# Altium PCB Труба_сенсор.PcbDoc
Units mm, origin at the board's own origin, x right, y up, seen from the top; angles counter-clockwise.
Board outline 25 x 25 mm, 2 copper layers (Top Layer, Bottom Layer), stack 1.671 mm thick; 1 components, 3 nets, 23 pads, 6 vias.
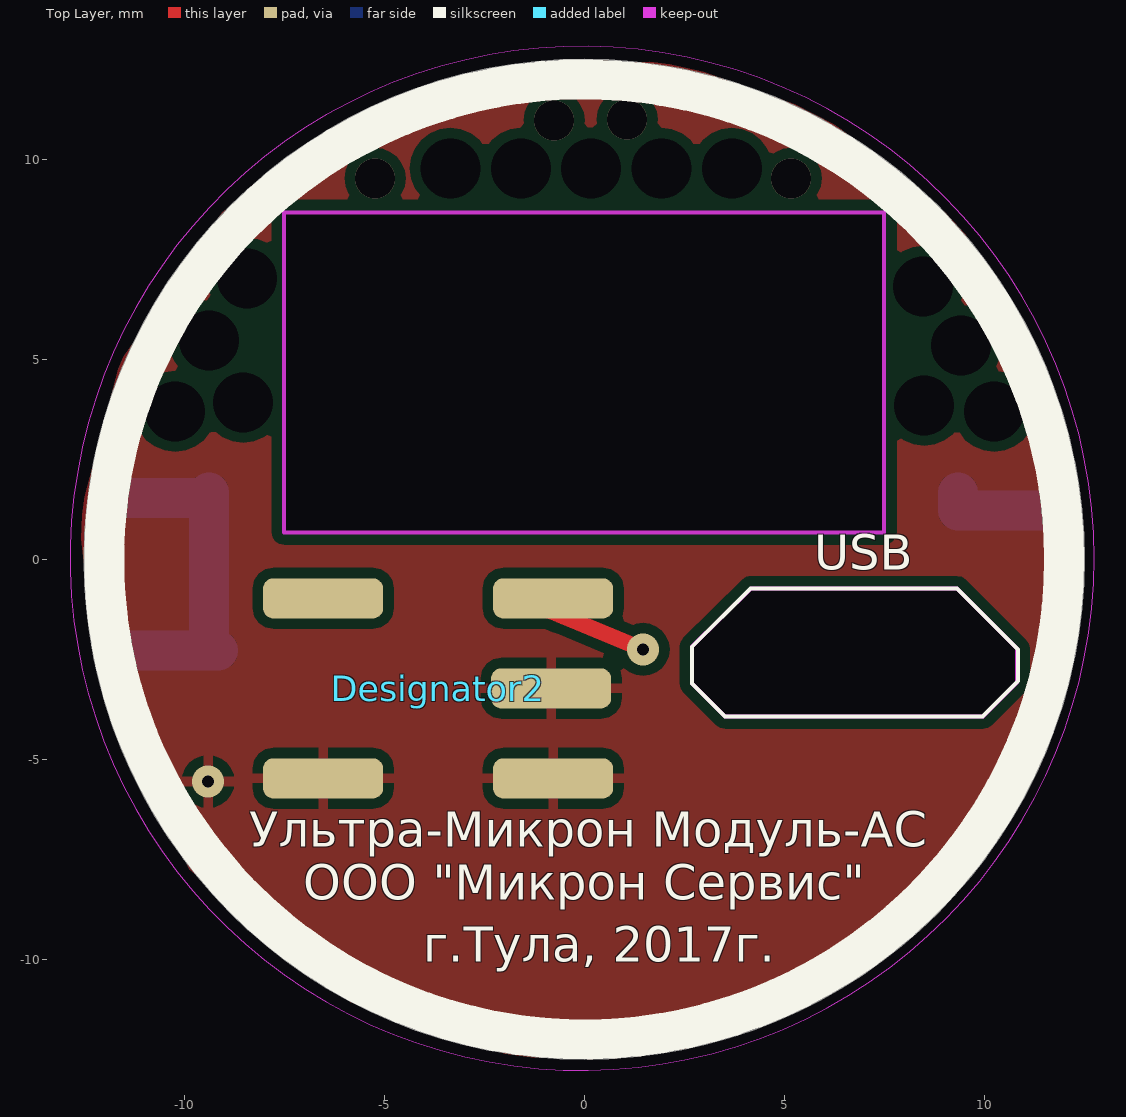
[diagram p0: Top Layer view]
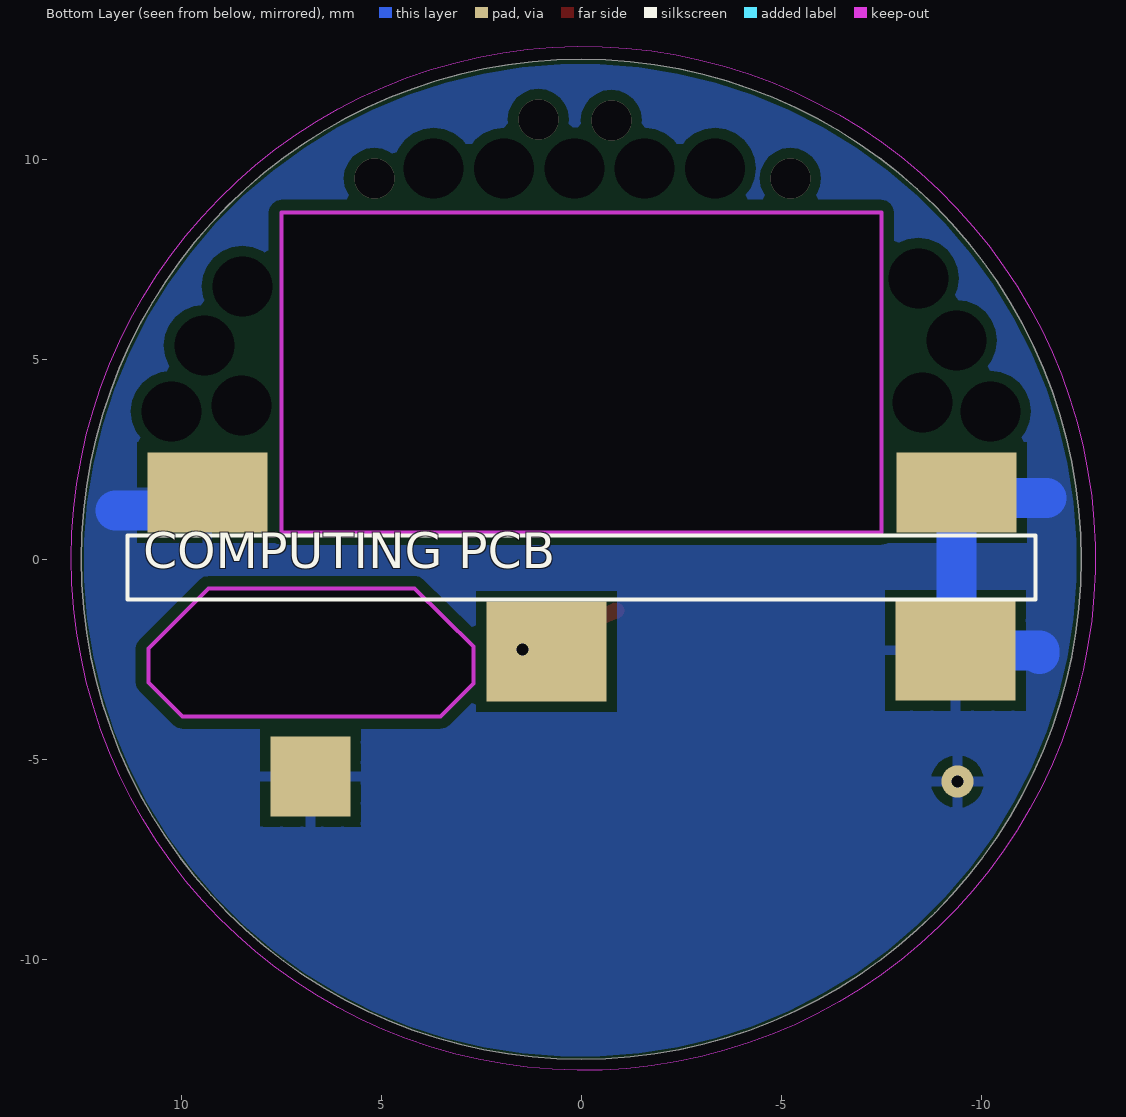
[diagram p1: Bottom Layer view, seen from below]

## Layer stack, top to bottom
Top Solder: solder mask 0.0102, Solder Resist, Dk 3.5
Top Layer: signal copper 0.0356
Dielectric 1: dielectric 1.6, FR-4, Dk 4.8
Bottom Layer: signal copper 0.0356
Bottom Solder: solder mask 0.0102, Solder Resist, Dk 3.5

## Board outline
-12.5,0 ccw(c0,0) 0,-12.5 ccw(c0,0) 12.5,0 ccw(c0,0) 0,12.5 ccw(c0,0)
cut-out: 10.85,-3.04 9.965,-3.925 3.525,-3.925 2.7,-3.1 2.7,-2.185 4.16,-0.725 9.325,-0.725 10.85,-2.25
cut-out: 7.5,0.675 7.5,8.675 -7.5,8.675 -7.5,0.675

## Design rules (kind name [scope] priority, off if disabled: settings)
Clearance [All] p1: gap=0.254
ComponentClearance [All] p1: gap=0.001 collisioncheckmode=3 verticalgap=0.254 showdistances=FALSE
HoleToHoleClearance [All] p1: gap=0.2 allowstackedmicrovias=TRUE
PolygonConnect [All] p1: connectstyle=Relief reliefconductorwidth=0.254 reliefentries=4 polygonreliefangle="90 Angle" airgapwidth=0.254
RoutingVias [All] p1: holewidth=0.711 width=1.27 viastyle="Through Hole" minholewidth=0.711 minwidth=1.27 maxholewidth=0.711 maxwidth=1.27
SolderMaskExpansion [All] p1: expansion=0.102
Width [All] p1: maxlimit=2 minlimit=0.254 preferedwidth=0.254 minimp=50.000000 maximp=50.000000 favimp=50.000000
28 further rules are at their usual default settings.

## Components (designator, comment, footprint, x,y, rotation, side; value= is the part's Value field where it differs from the comment)
Designator2 "Comment" "Button 6*6" -3.625,-3.2 r0 top

## Footprints (in the part's own frame and the unit in brackets; to place one, negate y for a bottom-side part, rotate by r counter-clockwise, add the part's x,y. Pads: shape width x height; smd on the part's side, far side on the other; paste and mask are expansions set on the pad)
"Button 6*6" [mm]
  rrect50% 3x1 smd: 0(-2.9,-2.275) 0(-2.9,2.225) 0(2.85,-2.275) 0(2.85,2.225)
  body extent -4.03,-3.28 3.97,3.22, height 5

## Free pads (board coordinates)
  round 0 hole 1.5: 7(-3.342,9.775) 8(3.692,9.775) 9(0.175,9.775) 10(-8.425,7.025) 10(8.475,6.825) 11(-9.375,5.475) 11(-8.525,3.925) 11(9.425,5.35) 11(10.25,3.7) 14(-10.225,3.7) 14(8.5,3.85) 15(-1.583,9.775) 16(1.933,9.775)
  rect 3x2 smd far side: 17(-9.375,1.675) 17(9.35,1.675)
  rect 3x2.5 smd far side: 18(-9.35,-2.275) 19(0.875,-2.3)
  rect 2x2 smd far side: 22(6.775,-5.425)
  rrect50% 3x1 smd: 23(-0.825,-3.225)

## Via types
v1: diameter 1, hole 1, Top Layer to Bottom Layer, 4 vias
v2: diameter 0.8, hole 0.3, Top Layer to Bottom Layer, tented both sides, 2 vias

## Nets (pads, with @x,y where several pads share a name; then routed paths per layer and width w, separated by ;. In a path a pad name is that pad's centre, name@x,y a point inside that pad or via, vN(x,y) a via of type N, cw(c..) or ccw(c..) an arc to the next point about the centre after c; other vN are vias at no path point)
GND: Designator2.0@-0.775,-5.475 Designator2.0@-6.525,-5.475 pad.17 pad.18 pad.22 pad.23 | length 11.4
  Bottom Layer w1: -11.633,1.531 pad.17@-9.375,1.531 ; -11.453,-2.363 -11.453,-2.275 pad.18@-9.375,-2.275 ; pad.17@-9.375,1.675 pad.17@-9.375,1.531 ; pad.18@-9.15,-2.275 pad.18 pad.18@-9.375,-2.275 ; pad.17@9.35,1.675 9.35,1.225 11.653,1.225 ; pad.18@-9.375,-2.275 pad.17@-9.375,1.531
  other v2: -9.4,-5.554
NewNet: Designator2.0@-0.775,-0.975 pad.19 | length 2.5
  Top Layer w0.4: Designator2.0@-0.875,-1.275 -0.866,-1.279 -0.857,-1.282 Designator2.0@-0.85,-1.286 ; Designator2.0@-0.848,-1.286 -0.84,-1.29 -0.831,-1.293 -0.778,-1.315 -0.689,-1.352 -0.601,-1.389 -0.517,-1.423 -0.512,-1.426 v2(1.475,-2.25)
NewNet4: 
pads on no net: Designator2.0@-6.525,-0.975
copper on no net:
  other v1: -5.225,9.525 5.175,9.525 -0.75,10.975 1.075,11

## Polygon pours and split planes (outlines as drawn)
GND on Bottom Layer "Top Layer-No Net" (hatched 90Degree grid 0.508 track 0.203, pour order 0): -11.875,-1.025 -8.55,-1.025 -8.55,-1.075 -8.55,-1.025 -7.85,-1.025 -7.9,-1.025 -7.9,-6.25 -7.9,-6.575 -0.325,-6.575 -0.1,-6.575 -0.1,-4.675 -0.1,-4.475 10.9,-4.475 8.4,-8.525 4.25,-11.35 -0.15,-11.75 -5.75,-10.45 -9.85,-7.05
GND on Bottom Layer "Top Layer-No Net" (solid, pour order 2): -12.375,-0.025 ccw(c0.025,-0.025) 0.025,-12.425 ccw(c0.025,-0.025) 12.425,-0.025 ccw(c0.025,-0.025) 0.025,12.375 ccw(c0.025,-0.025)
GND on Top Layer "Top Layer-No Net" (solid, pour order 6): 12.55,0.45 11.825,4.6 9.325,8.425 5.925,11.15 2.225,12.45 -1.725,12.375 -5.675,11.15 -9.05,8.675 -11.6,4.95 -12.625,1.025 -12.225,-2.625 -9.875,-7.75 -5.85,-11.075 -1.625,-12.475 2.975,-12.225 7.375,-10.25 10.225,-7.425 12.025,-3.725

## Keep-outs
Keep-Out Layer:
  circle w0.01: c-0.05,0.025 r12.8
  lines w0.1: -7.5,0.675 -7.5,8.675 7.5,8.675 7.5,0.675 -0.825,0.675 -7.5,0.675 ; 2.7,-3.1 2.7,-2.175 4.173,-0.727 9.327,-0.727 10.825,-2.225 10.825,-3.075 9.975,-3.925 3.525,-3.925 2.7,-3.1

## Silkscreen, mask and mechanical layers (free items; w line width, h text height)
Top Overlay:
  circle w1: c0,0 r12
  lines w0.1: 2.7,-3.1 3.525,-3.925 9.965,-3.925 10.85,-3.04 10.85,-2.25 9.325,-0.725 4.16,-0.725 2.7,-2.185 2.7,-3.1
  text "USB" at 5.75,-0.55 h1.5
  text "Ультра-Микрон Модуль-АС" at -8.375,-7.475 h1.5
  text "ООО \"Микрон Сервис\"" at -7.025,-8.8 h1.5
  text "г.Тула, 2017г." at -4.025,-10.35 h1.5
Bottom Overlay:
  lines w0.1: -11.35,-1 11.35,-1 11.35,0.6 -11.35,0.6 -11.35,-1
  text "COMPUTING PCB" at 10.95,-0.525 h1.52
Bottom Solder:
  circle w1: c0.025,-0.025 r12
Mechanical 1:
  lines w0.1: 2.7,-3.1 2.7,-2.175 4.15,-0.725 9.325,-0.725 10.85,-2.25 10.85,-3.075 10,-3.925 3.525,-3.925 2.7,-3.1